# Altium PCB PCB1.PcbDoc (part 1 of 2)
Units mm, origin at the board's own origin, x right, y up, seen from the top; angles counter-clockwise.
Board outline 152.4 x 101.6 mm, 2 copper layers (Top Layer, Bottom Layer); 161 components, 26 nets, 707 pads, 0 vias.
Unrouted connection lines stored in the file: 171.
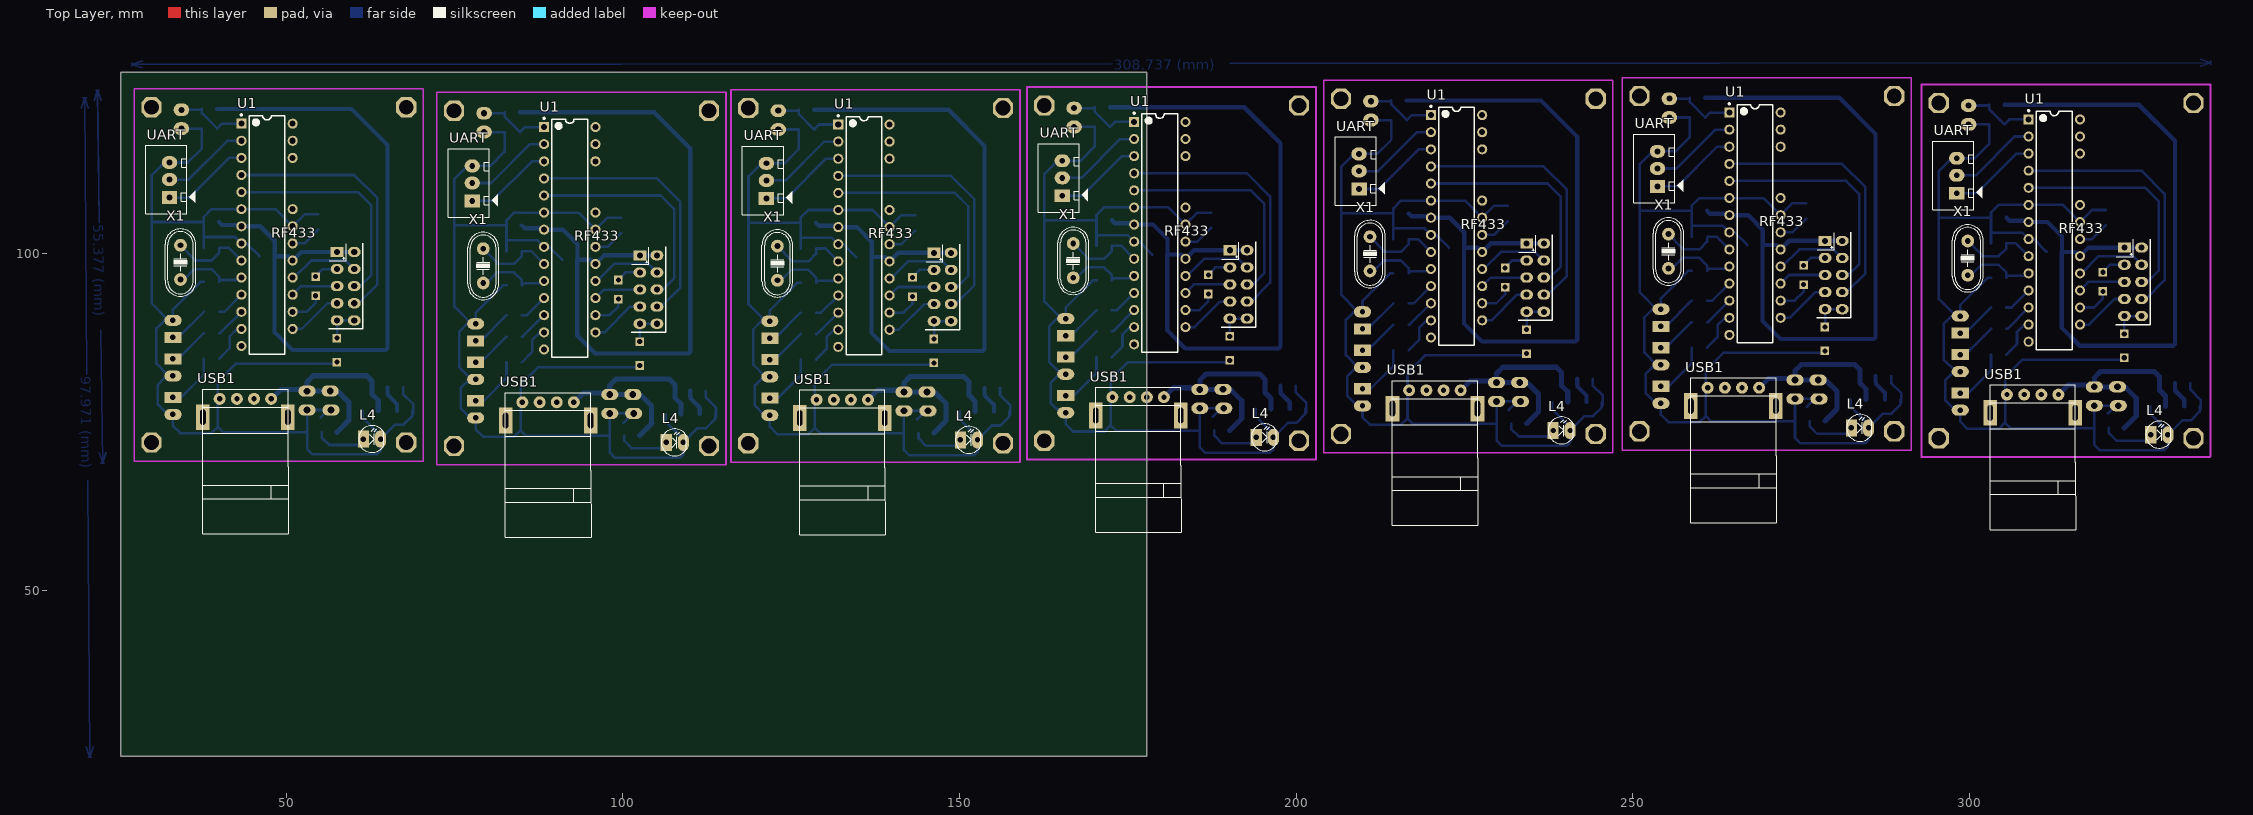
[diagram p0: Top Layer view]
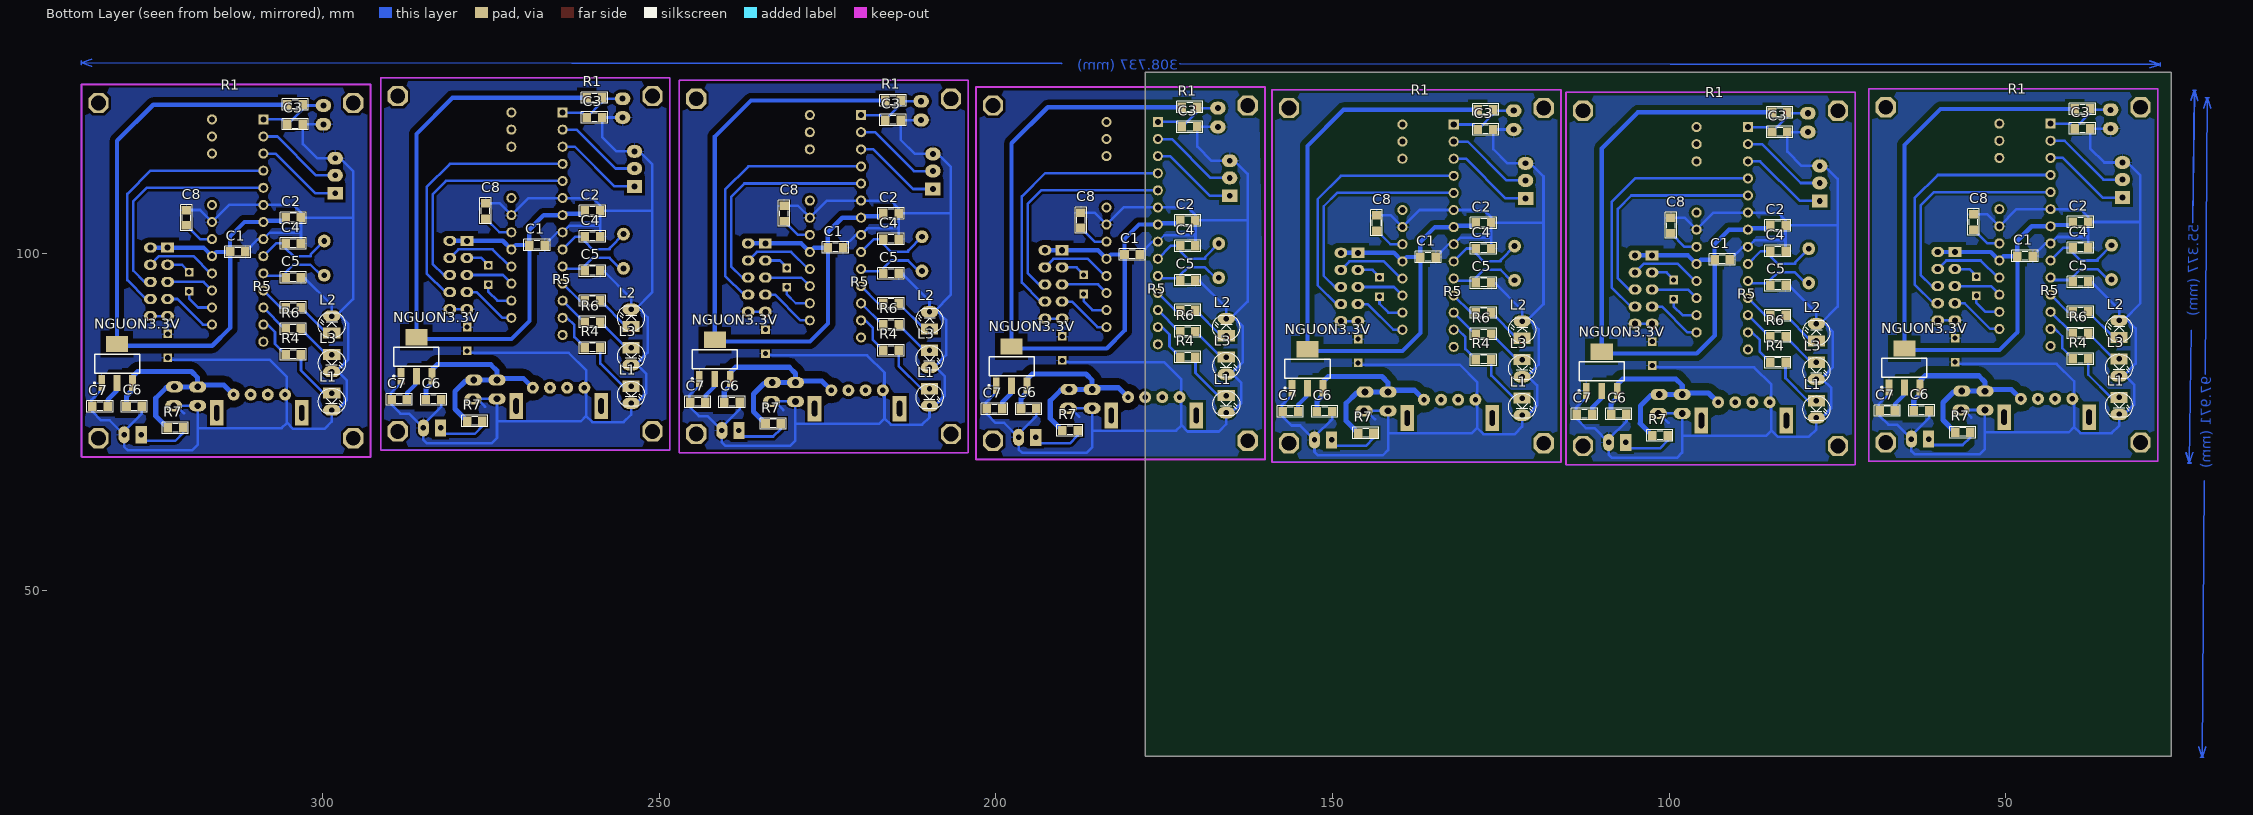
[diagram p1: Bottom Layer view, seen from below]

## Layer stack, top to bottom
Top Solder: solder mask 0.0102, Solder Resist, Dk 3.5
Top Layer: signal copper 0.0356
Dielectric 1: dielectric 0.32, FR-4, Dk 4.8
Bottom Layer: signal copper 0.0356
Bottom Solder: solder mask 0.0102, Solder Resist, Dk 3.5

## Board outline
25.4,25.4 177.8,25.4 177.8,127 25.4,127

## Design rules (kind name [scope] priority, off if disabled: settings)
Clearance 3.31V [InNet('3.3V')] p1: gap=0.762
Clearance 51V [InNet('VCC')] p2: gap=1.016
Clearance [All] p3: gap=0.381
PolygonConnect [All] p1: connectstyle=Relief reliefconductorwidth=0.254 reliefentries=4 polygonreliefangle="90 Angle" airgapwidth=0.254
RoomDefinition RF433 [InComponentClass('RF433')] p1: confinementstyle=ConfineIn formatcopy=TRUE lockcomponents=FALSE outline 178.943,26.797 208.229,26.797 208.229,51.308 178.943,51.308
RoutingVias [All] p1: holewidth=0.711 width=1.27 viastyle="Through Hole" minholewidth=0.711 minwidth=1.27 maxholewidth=0.711 maxwidth=1.27
SolderMaskExpansion [All] p1: expansion=0.102
UnpouredPolygon [All] p1: allowunpoured=FALSE
Width 3.3V [InNet('3.3V')] p1: maxlimit=0.762 minlimit=0.508 preferedwidth=0.635
Width 5V [InNet('VCC')] p2: maxlimit=1.016 minlimit=0.508 preferedwidth=0.762
Width [All] p3: maxlimit=0.381 minlimit=0.127 preferedwidth=0.381
29 further rules are at their usual default settings.

## Classes and differential pairs
component class RF433: C1 C2 C3 C4 C5 C6 C7 C8 L1 L2 L3 L4 NGUON3.3V R1 R4 R5 R6 R7 RF433 U1 UART USB1 X1

## Components (designator, comment, footprint, x,y, rotation, side; value= is the part's Value field where it differs from the comment)
C1 "104" SM-0805 312.572,100.305 r0 bottom
C1 "104" SM-0805 47.142,99.67 r0 bottom
C1 "104" SM-0805 92.1,99.162 r0 bottom
C1 "104" SM-0805 135.788,99.543 r0 bottom
C1 "104" SM-0805 179.73,99.924 r0 bottom
C1 "104" SM-0805 223.799,100.94 r0 bottom
C1 "104" SM-0805 268.122,101.321 r0 bottom
C2 "104" SM-0805 304.317,105.385 r180 bottom
C2 "104" SM-0805 38.887,104.75 r180 bottom
C2 "104" SM-0805 83.845,104.242 r180 bottom
C2 "104" SM-0805 127.533,104.623 r180 bottom
C2 "104" SM-0805 171.475,105.004 r180 bottom
C2 "104" SM-0805 215.544,106.02 r180 bottom
C2 "104" SM-0805 259.867,106.401 r180 bottom
C3 "104" SM-0805 304.038,119.253 r0 bottom
C3 "104" SM-0805 38.608,118.618 r0 bottom
C3 "104" SM-0805 83.566,118.11 r0 bottom
C3 "104" SM-0805 127.254,118.491 r0 bottom
C3 "104" SM-0805 171.196,118.872 r0 bottom
C3 "104" SM-0805 215.265,119.888 r0 bottom
C3 "104" SM-0805 259.588,120.269 r0 bottom
C4 "104" SM-0805 304.317,101.575 r180 bottom
C4 "104" SM-0805 38.887,100.94 r180 bottom
C4 "104" SM-0805 83.845,100.432 r180 bottom
C4 "104" SM-0805 127.533,100.813 r180 bottom
C4 "104" SM-0805 171.475,101.194 r180 bottom
C4 "104" SM-0805 215.544,102.21 r180 bottom
C4 "104" SM-0805 259.867,102.591 r180 bottom
C5 "104" SM-0805 304.317,96.495 r180 bottom
C5 "104" SM-0805 38.887,95.86 r180 bottom
C5 "104" SM-0805 83.845,95.352 r180 bottom
C5 "104" SM-0805 127.533,95.733 r180 bottom
C5 "104" SM-0805 171.475,96.114 r180 bottom
C5 "104" SM-0805 215.544,97.13 r180 bottom
C5 "104" SM-0805 259.867,97.511 r180 bottom
C6 "103" SM-0805 327.939,77.368 r0 bottom
C6 "103" SM-0805 62.509,76.733 r0 bottom
C6 "103" SM-0805 107.467,76.225 r0 bottom
C6 "103" SM-0805 151.155,76.606 r0 bottom
C6 "103" SM-0805 195.097,76.987 r0 bottom
C6 "103" SM-0805 239.166,78.003 r0 bottom
C6 "103" SM-0805 283.489,78.384 r0 bottom
C7 "103" SM-0805 333.019,77.368 r180 bottom
C7 "103" SM-0805 67.589,76.733 r180 bottom
C7 "103" SM-0805 112.547,76.225 r180 bottom
C7 "103" SM-0805 156.235,76.606 r180 bottom
C7 "103" SM-0805 200.177,76.987 r180 bottom
C7 "103" SM-0805 244.246,78.003 r180 bottom
C7 "103" SM-0805 288.569,78.384 r180 bottom
C8 "104" SM-0805 320.192,105.385 r270 bottom
C8 "104" SM-0805 54.762,104.75 r270 bottom
C8 "104" SM-0805 99.72,104.242 r270 bottom
C8 "104" SM-0805 143.408,104.623 r270 bottom
C8 "104" SM-0805 187.35,105.004 r270 bottom
C8 "104" SM-0805 231.419,106.02 r270 bottom
C8 "104" SM-0805 275.742,106.401 r270 bottom
L1 "LED" LED-3 298.602,79.35 r270 bottom
L1 "LED" LED-3 33.172,78.715 r270 bottom
L1 "LED" LED-3 78.13,78.207 r270 bottom
L1 "LED" LED-3 121.818,78.588 r270 bottom
L1 "LED" LED-3 165.76,78.969 r270 bottom
L1 "LED" LED-3 209.829,79.985 r270 bottom
L1 "LED" LED-3 254.152,80.366 r270 bottom
L2 "LED" LED-3 298.602,88.24 r90 bottom
L2 "LED" LED-3 33.172,87.605 r90 bottom
L2 "LED" LED-3 78.13,87.097 r90 bottom
L2 "LED" LED-3 121.818,87.478 r90 bottom
L2 "LED" LED-3 165.76,87.859 r90 bottom
L2 "LED" LED-3 209.829,88.875 r90 bottom
L2 "LED" LED-3 254.152,89.256 r90 bottom
L3 "LED" LED-3 298.602,85.065 r270 bottom
L3 "LED" LED-3 33.172,84.43 r270 bottom
L3 "LED" LED-3 78.13,83.922 r270 bottom
L3 "LED" LED-3 121.818,84.303 r270 bottom
L3 "LED" LED-3 165.76,84.684 r270 bottom
L3 "LED" LED-3 209.829,85.7 r270 bottom
L3 "LED" LED-3 254.152,86.081 r270 bottom
L4 "LED" LED-3 326.898,73.152 r0 top
L4 "LED" LED-3 61.468,72.517 r0 top
L4 "LED" LED-3 106.426,72.009 r0 top
L4 "LED" LED-3 150.114,72.39 r0 top
L4 "LED" LED-3 194.056,72.771 r0 top
L4 "LED" LED-3 238.125,73.787 r0 top
L4 "LED" LED-3 282.448,74.168 r0 top
NGUON3.3V "LM1117" SOT223-4N 330.479,83.718 r90 bottom
NGUON3.3V "LM1117" SOT223-4N 65.049,83.083 r90 bottom
NGUON3.3V "LM1117" SOT223-4N 110.007,82.575 r90 bottom
NGUON3.3V "LM1117" SOT223-4N 153.695,82.956 r90 bottom
NGUON3.3V "LM1117" SOT223-4N 197.637,83.337 r90 bottom
NGUON3.3V "LM1117" SOT223-4N 241.706,84.353 r90 bottom
NGUON3.3V "LM1117" SOT223-4N 286.029,84.734 r90 bottom
R1 "10" SM-0805 304.038,122.174 r0 bottom
R1 "10" SM-0805 38.608,121.539 r0 bottom
R1 "10" SM-0805 83.566,121.031 r0 bottom
R1 "10" SM-0805 127.254,121.412 r0 bottom
R1 "10" SM-0805 171.196,121.793 r0 bottom
R1 "10" SM-0805 215.265,122.809 r0 bottom
R1 "10" SM-0805 259.588,123.19 r0 bottom
R4 "1k" SM-0805 304.317,85.065 r180 bottom
R4 "1k" SM-0805 38.887,84.43 r180 bottom
R4 "1k" SM-0805 83.845,83.922 r180 bottom
R4 "1k" SM-0805 127.533,84.303 r180 bottom
R4 "1k" SM-0805 171.475,84.684 r180 bottom
R4 "1k" SM-0805 215.544,85.7 r180 bottom
R4 "1k" SM-0805 259.867,86.081 r180 bottom
R5 "1k" SM-0805 304.317,92.05 r180 bottom
R5 "1k" SM-0805 38.887,91.415 r180 bottom
R5 "1k" SM-0805 83.845,90.907 r180 bottom
R5 "1k" SM-0805 127.533,91.288 r180 bottom
R5 "1k" SM-0805 171.475,91.669 r180 bottom
R5 "1k" SM-0805 215.544,92.685 r180 bottom
R5 "1k" SM-0805 259.867,93.066 r180 bottom
R6 "1k" SM-0805 304.317,88.875 r180 bottom
R6 "1k" SM-0805 38.887,88.24 r180 bottom
R6 "1k" SM-0805 83.845,87.732 r180 bottom
R6 "1k" SM-0805 127.533,88.113 r180 bottom
R6 "1k" SM-0805 171.475,88.494 r180 bottom
R6 "1k" SM-0805 215.544,89.51 r180 bottom
R6 "1k" SM-0805 259.867,89.891 r180 bottom
R7 "1k" SM-0805 321.818,74.168 r180 bottom
R7 "1k" SM-0805 56.388,73.533 r180 bottom
R7 "1k" SM-0805 101.346,73.025 r180 bottom
R7 "1k" SM-0805 145.034,73.406 r180 bottom
R7 "1k" SM-0805 188.976,73.787 r180 bottom
R7 "1k" SM-0805 233.045,74.803 r180 bottom
R7 "1k" SM-0805 277.368,75.184 r180 bottom
RF433 "Header 5x2" HED2X5_CEN 322.986,100.94 r270 top
RF433 "Header 5x2" HED2X5_CEN 57.556,100.305 r270 top
RF433 "Header 5x2" HED2X5_CEN 102.514,99.797 r270 top
RF433 "Header 5x2" HED2X5_CEN 146.202,100.178 r270 top
RF433 "Header 5x2" HED2X5_CEN 190.144,100.559 r270 top
RF433 "Header 5x2" HED2X5_CEN 234.213,101.575 r270 top
RF433 "Header 5x2" HED2X5_CEN 278.536,101.956 r270 top
U1 "ATmega8A-PU" 28P3 312.572,103.48 r0 top
U1 "ATmega8A-PU" 28P3 47.142,102.845 r0 top
U1 "ATmega8A-PU" 28P3 92.1,102.337 r0 top
U1 "ATmega8A-PU" 28P3 135.788,102.718 r0 top
U1 "ATmega8A-PU" 28P3 179.73,103.099 r0 top
U1 "ATmega8A-PU" 28P3 223.799,104.115 r0 top
U1 "ATmega8A-PU" 28P3 268.122,104.496 r0 top
UART "JP3" CON3 298.094,109.144 r90 top
UART "JP3" CON3 32.664,108.509 r90 top
UART "JP3" CON3 77.622,108.001 r90 top
UART "JP3" CON3 121.31,108.382 r90 top
UART "JP3" CON3 165.252,108.763 r90 top
UART "JP3" CON3 209.321,109.779 r90 top
UART "JP3" CON3 253.644,110.16 r90 top
USB1 "USB-S" USB-A 313.182,79.121 r180 top
USB1 "USB-S" USB-A 47.752,78.486 r180 top
USB1 "USB-S" USB-A 92.71,77.978 r180 top
USB1 "USB-S" USB-A 136.398,78.359 r180 top
USB1 "USB-S" USB-A 180.34,78.74 r180 top
USB1 "USB-S" USB-A 224.409,79.756 r180 top
USB1 "USB-S" USB-A 268.732,80.137 r180 top
X1 "4MHz" XT2 299.72,99.39 r90 top
X1 "4MHz" XT2 34.29,98.755 r90 top
X1 "4MHz" XT2 79.248,98.247 r90 top
X1 "4MHz" XT2 122.936,98.628 r90 top
X1 "4MHz" XT2 166.878,99.009 r90 top
X1 "4MHz" XT2 210.947,100.025 r90 top
X1 "4MHz" XT2 255.27,100.406 r90 top

## Footprints (in the part's own frame and the unit in brackets; to place one, negate y for a bottom-side part, rotate by r counter-clockwise, add the part's x,y. Pads: shape width x height; smd on the part's side, far side on the other; paste and mask are expansions set on the pad)
28P3 [mm] "DIP, 28-Leads, Row Spacing 7.62mm, Pitch 2.54mm, Body 34.67x7.3mm"
  rect 1.5x1.5 hole 0.9: 1(-3.81,16.51)
  round 1.5 hole 0.9: 2(-3.81,13.97) 3(-3.81,11.43) 4(-3.81,8.89) 5(-3.81,6.35) 6(-3.81,3.81) 7(-3.81,1.27) 8(-3.81,-1.27) 9(-3.81,-3.81) 10(-3.81,-6.35) 11(-3.81,-8.89) 12(-3.81,-11.43) 13(-3.81,-13.97) 14(-3.81,-16.51) 16(3.81,-13.97) 17(3.81,-11.43) 18(3.81,-8.89) 19(3.81,-6.35) 20(3.81,-3.81) 21(3.81,-1.27) 22(3.81,1.27) 23(3.81,3.81) 26(3.81,11.43) 27(3.81,13.97) 28(3.81,16.51)
  round 0 all layers, no hole: 15(3.81,-16.51) 24(3.81,6.35) 25(3.81,8.89)
  silkscreen extent -3.93,-17.7 2.65,17.93, body extent -3.6,-17.65 3.6,17.65, height 4.58
CON3 [mil] "CON 3"
  rect 75x90 hole 34: 1(-5,0)
  oval 75x90 hole 34: 2(100,0) 3(200,0)
  silkscreen extent -100,-150 300,140, body extent -95,-90 295,136, height 276
HED2X5_CEN [mm] "Connector; Header; 5x2 Position"
  rect 1.5x1.9 hole 0.9: 1(0,0)
  oval 1.5x1.9 hole 0.9: 2(2.54,0) 3(5.08,0) 4(7.62,0) 5(10.16,0) 6(0,2.54) 7(2.54,2.54) 8(5.08,2.54) 9(7.62,2.54) 10(10.16,2.54)
  silkscreen extent -1.27,-1.27 11.43,3.81, body extent -1.24,-10.02 11.46,2.86, height 5.02
LED-3 [mil] "LED 2 PIN, 3ly Only colour"
  rect 65x100 hole 32: 1(0,0)
  oval 65x100 hole 32: 2(100,0)
  silkscreen extent -29,-78 118,79, body extent -25,-75 113,75, height 217
SM-0805 [mil] "Compoment SMD 80x50mil"
  rect 50x55 smd: 1(-45,0) 2(45,0)
  silkscreen extent -77,-34 76,33, body extent -40,-27 40,23, height 24
SOT223-4N [mm] "SOT223, 4-Leads, Body 6.5x3.5mm, Pitch 2.3mm, Lead Span 7mm, IPC Medium Density"
  rect 2.4x1 smd: 1(-2.9,2.3) 2(-2.9,0) 3(-2.9,-2.3)
  rect 2.4x3.3 smd: 4(2.9,0)
  silkscreen extent -3.02,-3.35 1.4,3.48, body extent -3.39,-3.27 3.5,3.23, height 1.72
USB-A [mil]
  round 70 hole 31: 1(0,0) 2(100,0) 3(200,0) 4(301,0)
  rect 80x150 hole 31 slot 90 at 90 deg: 5(-98,107) 6(399,107)
  silkscreen extent -101,-57 401,790, body extent -97,0 399,784, height 177
XT2 [mil] "Footpin for Crystal 2 pin"
  round 75 hole 34: 1(-100,0) 2(100,0)
  silkscreen extent -198,-90 195,90, body extent -233,-93 213,90, height 138

## Part data
C1 C1 C1 C1 C1 C1 C1 C2 C2 C2 C2 C2 C2 C2 C3 C3 C3 C3 C3 C3 C3 C4 C4 C4 C4 C4 C4 C4 C5 C5 C5 C5 C5 C5 C5 C6 C6 C6 C6 C6 C6 C6 C7 C7 C7 C7 C7 C7 C7 C8 C8 C8 C8 C8 C8 C8: library part CM, "Cap SMD"
L1 L1 L1 L1 L1 L1 L1 L2 L2 L2 L2 L2 L2 L2 L3 L3 L3 L3 L3 L3 L3 L4 L4 L4 L4 L4 L4 L4: "LED Single colour Green and Red"
NGUON3.3V NGUON3.3V NGUON3.3V NGUON3.3V NGUON3.3V NGUON3.3V NGUON3.3V: "3v3"
R1 R1 R1 R1 R1 R1 R1 R4 R4 R4 R4 R4 R4 R4 R5 R5 R5 R5 R5 R5 R5 R6 R6 R6 R6 R6 R6 R6 R7 R7 R7 R7 R7 R7 R7: library part R, "Resistor 1/4W"
RF433 RF433 RF433 RF433 RF433 RF433 RF433: library part HED5x2
U1 U1 U1 U1 U1 U1 U1: "8-bit AVR Microcontroller, 8KB Flash, 512 Bytes EEPROM, 1KB SRAM, 28-pin PDIP, Industrial Grade (-40°C to 85°C)"
UART UART UART UART UART UART UART: library part Con3, "Connector 3"
USB1 USB1 USB1 USB1 USB1 USB1 USB1: library part USB_S, "USB connector"
X1 X1 X1 X1 X1 X1 X1: library part XT2, "Crystal For all Crystal 2pin."

## Free pads (board coordinates)
  oct 3x3 hole 2.2: 0(29.972,121.793) 0(74.93,121.285) 0(118.618,121.666) 0(162.56,122.047) 0(206.629,123.063) 0(250.952,123.444) 0(295.402,122.428) 1(67.818,121.793) 1(112.776,121.285) 1(156.464,121.666) 1(200.406,122.047) 1(244.475,123.063) 1(288.798,123.444) 1(333.248,122.428) 2(67.818,72.009) 2(112.776,71.501) 2(156.464,71.882) 2(200.406,72.263) 2(244.475,73.279) 2(288.798,73.66) 2(333.248,72.644) 3(29.972,72.009) 3(74.93,71.501) 3(118.618,71.882) 3(162.56,72.263) 3(206.629,73.279) 3(250.952,73.66) 3(295.402,72.644)
  oval 2.3x1.9 hole 0.9: 0(34.417,121.412) 0(79.375,120.904) 0(123.063,121.285) 0(167.005,121.666) 0(211.074,122.682) 0(255.397,123.063) 0(299.847,122.047) 1(34.417,118.618) 1(79.375,118.11) 1(123.063,118.491) 1(167.005,118.872) 1(211.074,119.888) 1(255.397,120.269) 1(299.847,119.253)
  oval 2.54x1.651 hole 1: 0(53.086,79.629) 0(56.515,79.645) 0(56.642,76.835) 0(98.044,79.121) 0(101.473,79.137) 0(101.6,76.327) 0(141.732,79.502) 0(145.161,79.518) 0(145.288,76.708) 0(185.674,79.883) 0(189.103,79.899) 0(189.23,77.089) 0(229.743,80.899) 0(233.172,80.915) 0(233.299,78.105) 0(274.066,81.28) 0(277.495,81.296) 0(277.622,78.486) 0(318.516,80.264) 0(321.945,80.28) 0(322.072,77.47) 1(53.086,76.835) 1(98.044,76.327) 1(141.732,76.708) 1(185.674,77.089) 1(229.743,78.105) 1(274.066,78.486) 1(318.516,77.47)
  rect 1.27x1.27 hole 0.762: 0(57.531,83.947) 0(102.489,83.439) 0(146.177,83.82) 0(190.119,84.201) 0(234.188,85.217) 0(278.511,85.598) 0(322.961,84.582) 2(57.531,87.503) 2(102.489,86.995) 2(146.177,87.376) 2(190.119,87.757) 2(234.188,88.773) 2(278.511,89.154) 2(322.961,88.138) 3(54.356,96.647) 3(99.314,96.139) 3(143.002,96.52) 3(186.944,96.901) 3(231.013,97.917) 3(275.336,98.298) 3(319.786,97.282) 4(54.356,93.802) 4(99.314,93.294) 4(143.002,93.675) 4(186.944,94.056) 4(231.013,95.072) 4(275.336,95.453) 4(319.786,94.437)

## Nets (pads, with @x,y where several pads share a name; then routed paths per layer and width w, separated by ;. In a path a pad name is that pad's centre, name@x,y a point inside that pad or via, vN(x,y) a via of type N, cw(c..) or ccw(c..) an arc to the next point about the centre after c; other vN are vias at no path point)
3.3V: C1.2 C2.1 C7.2 NGUON3.3V.2 NGUON3.3V.4 R1.2 RF433.1 RF433.6 U1.7 U1.20 | length 807.3
  Bottom Layer w0.635: R1.2@39.751,121.539 59.69,121.539 65.049,116.18 NGUON3.3V.4@65.049,85.983 64.791,85.725 50.927,85.725 48.26,88.392 48.26,99.644 C1.2@48.285,99.67 ; C2.1@40.03,104.75 40.462,104.318 43.129,104.318 U1.7@43.332,104.115 46.126,104.115 48.285,101.956 C1.2@48.285,99.67 ; RF433.6@60.096,100.305 RF433.1@57.556,100.305 52.222,100.305 U1.20@50.952,99.035 50.317,99.67 C1.2@48.285,99.67 ; NGUON3.3V.2@65.049,80.183 65.049,79.375 65.113,79.312 65.113,79.057 66.446,77.724 C7.2@66.446,76.733 ; R1.2@84.709,121.031 104.648,121.031 110.007,115.672 NGUON3.3V.4@110.007,85.475 109.749,85.217 95.885,85.217 93.218,87.884 93.218,99.136 C1.2@93.243,99.162 ; C2.1@84.988,104.242 85.42,103.81 88.087,103.81 U1.7@88.29,103.607 91.084,103.607 93.243,101.448 C1.2@93.243,99.162 ; RF433.6@105.054,99.797 RF433.1@102.514,99.797 97.18,99.797 U1.20@95.91,98.527 95.275,99.162 C1.2@93.243,99.162 ; NGUON3.3V.2@110.007,79.675 110.007,78.867 110.071,78.804 110.071,78.549 111.404,77.216 C7.2@111.404,76.225 ; R1.2@128.397,121.412 148.336,121.412 153.695,116.053 NGUON3.3V.4@153.695,85.856 153.437,85.598 139.573,85.598 136.906,88.265 136.906,99.517 C1.2@136.931,99.543 ; C2.1@128.676,104.623 129.108,104.191 131.775,104.191 U1.7@131.978,103.988 134.772,103.988 136.931,101.829 C1.2@136.931,99.543 ; RF433.6@148.742,100.178 RF433.1@146.202,100.178 140.868,100.178 U1.20@139.598,98.908 138.963,99.543 C1.2@136.931,99.543 ; NGUON3.3V.2@153.695,80.056 153.695,79.248 153.759,79.185 153.759,78.93 155.092,77.597 C7.2@155.092,76.606 ; R1.2@172.339,121.793 192.278,121.793 197.637,116.434 NGUON3.3V.4@197.637,86.237 197.379,85.979 183.515,85.979 180.848,88.646 180.848,99.898 C1.2@180.873,99.924 ; C2.1@172.618,105.004 173.05,104.572 175.717,104.572 U1.7@175.92,104.369 178.714,104.369 180.873,102.21 C1.2@180.873,99.924 ; RF433.6@192.684,100.559 RF433.1@190.144,100.559 184.81,100.559 U1.20@183.54,99.289 182.905,99.924 C1.2@180.873,99.924 ; NGUON3.3V.2@197.637,80.437 197.637,79.629 197.701,79.566 197.701,79.311 199.034,77.978 C7.2@199.034,76.987 ; R1.2@216.408,122.809 236.347,122.809 241.706,117.45 NGUON3.3V.4@241.706,87.253 241.448,86.995 227.584,86.995 224.917,89.662 224.917,100.914 C1.2@224.942,100.94 ; C2.1@216.687,106.02 217.119,105.588 219.786,105.588 U1.7@219.989,105.385 222.783,105.385 224.942,103.226 C1.2@224.942,100.94 ; RF433.6@236.753,101.575 RF433.1@234.213,101.575 228.879,101.575 U1.20@227.609,100.305 226.974,100.94 C1.2@224.942,100.94 ; NGUON3.3V.2@241.706,81.453 241.706,80.645 241.77,80.582 241.77,80.328 243.103,78.994 C7.2@243.103,78.003 ; R1.2@260.731,123.19 280.67,123.19 286.029,117.831 NGUON3.3V.4@286.029,87.634 285.771,87.376 271.907,87.376 269.24,90.043 269.24,101.295 C1.2@269.265,101.321 ; C2.1@261.01,106.401 261.442,105.969 264.109,105.969 U1.7@264.312,105.766 267.106,105.766 269.265,103.607 C1.2@269.265,101.321 ; RF433.6@281.076,101.956 RF433.1@278.536,101.956 273.202,101.956 U1.20@271.932,100.686 271.297,101.321 C1.2@269.265,101.321 ; NGUON3.3V.2@286.029,81.834 286.029,81.026 286.093,80.963 286.093,80.709 287.426,79.375 C7.2@287.426,78.384 ; R1.2@305.181,122.174 325.12,122.174 330.479,116.815 NGUON3.3V.4@330.479,86.618 330.221,86.36 316.357,86.36 313.69,89.027 313.69,100.279 C1.2@313.715,100.305 ; C2.1@305.46,105.385 305.892,104.953 308.559,104.953 U1.7@308.762,104.75 311.556,104.75 313.715,102.591 C1.2@313.715,100.305 ; RF433.6@325.526,100.94 RF433.1@322.986,100.94 317.652,100.94 U1.20@316.382,99.67 315.747,100.305 C1.2@313.715,100.305 ; NGUON3.3V.2@330.479,80.818 330.479,80.01 330.543,79.947 330.543,79.692 331.876,78.359 C7.2@331.876,77.368
AU: U1.14
BUT1: U1.23
BUT2: U1.25
CS: RF433.4 U1.16 | length 57.3
  Bottom Layer w0.381: U1.16@50.952,88.875 52.299,88.875 56.109,92.685 RF433.4@57.556,92.685 ; U1.16@95.91,88.367 97.257,88.367 101.067,92.177 RF433.4@102.514,92.177 ; U1.16@139.598,88.748 140.945,88.748 144.755,92.558 RF433.4@146.202,92.558 ; U1.16@183.54,89.129 184.887,89.129 188.697,92.939 RF433.4@190.144,92.939 ; U1.16@227.609,90.145 228.956,90.145 232.766,93.955 RF433.4@234.213,93.955 ; U1.16@271.932,90.526 273.279,90.526 277.089,94.336 RF433.4@278.536,94.336 ; U1.16@316.382,89.51 317.729,89.51 321.539,93.32 RF433.4@322.986,93.32
GDO0: RF433.9 U1.4 | length 275.7
  Bottom Layer w0.381: U1.4@43.332,111.735 60.071,111.735 63.525,108.28 63.525,95.479 60.731,92.685 RF433.9@60.096,92.685 RF433.9@60.477,92.685 ; U1.4@88.29,111.227 105.029,111.227 108.483,107.772 108.483,94.971 105.689,92.177 RF433.9@105.054,92.177 RF433.9@105.435,92.177 ; U1.4@131.978,111.608 148.717,111.608 152.171,108.153 152.171,95.352 149.377,92.558 RF433.9@148.742,92.558 RF433.9@149.123,92.558 ; U1.4@175.92,111.989 192.659,111.989 196.113,108.534 196.113,95.733 193.319,92.939 RF433.9@192.684,92.939 RF433.9@193.065,92.939 ; U1.4@219.989,113.005 236.728,113.005 240.182,109.55 240.182,96.749 237.388,93.955 RF433.9@236.753,93.955 RF433.9@237.134,93.955 ; U1.4@264.312,113.386 281.051,113.386 284.505,109.931 284.505,97.13 281.711,94.336 RF433.9@281.076,94.336 RF433.9@281.457,94.336 ; U1.4@308.762,112.37 325.501,112.37 328.955,108.915 328.955,96.114 326.161,93.32 RF433.9@325.526,93.32 RF433.9@325.907,93.32
GDO2: RF433.8 U1.5 | length 235.8
  Bottom Layer w0.381: U1.5@43.332,109.195 60.655,109.195 62.636,107.213 62.636,96.876 60.985,95.225 RF433.8@60.096,95.225 ; U1.5@88.29,108.687 105.613,108.687 107.594,106.705 107.594,96.368 105.943,94.717 RF433.8@105.054,94.717 ; U1.5@131.978,109.068 149.301,109.068 151.282,107.086 151.282,96.749 149.631,95.098 RF433.8@148.742,95.098 ; U1.5@175.92,109.449 193.243,109.449 195.224,107.467 195.224,97.13 193.573,95.479 RF433.8@192.684,95.479 ; U1.5@219.989,110.465 237.312,110.465 239.293,108.483 239.293,98.146 237.642,96.495 RF433.8@236.753,96.495 ; U1.5@264.312,110.846 281.635,110.846 283.616,108.864 283.616,98.527 281.965,96.876 RF433.8@281.076,96.876 ; U1.5@308.762,109.83 326.085,109.83 328.066,107.848 328.066,97.511 326.415,95.86 RF433.8@325.526,95.86